# EAGLE board Ex Adafruit I2C Adapter (EAGLE 7.2.0)

Size 26.5 x 32 mm. Coordinates in mm from the lower left corner, seen from the top.
Outline: 0,0 26.5,0 26.5,32 0,32 0,0
Copper layers (1*16): Top 0.035mm / dielectric 1.5mm / Bottom 0.035mm
Design rules "default": minimum track width 10mil, minimum drill 24mil, track to track 8mil, track to pad 8mil, pad to pad 8mil, via to via 8mil, smd to smd 8mil, copper to edge 40mil, drill to drill 8mil, minimum pad ring 10mil, minimum via ring 8mil, stop-mask expansion 4mil, vias tented up to drill 0mil, thermal gap 10mil

## Footprints (pad centres in the part's own frame; a part is rotated, then mirrored left to right if it is on the bottom)
1X04 = drill 1.016 long: 1 -3.81,0; 2 -1.27,0; 3 1.27,0; 4 3.81,0
CHIPLED_0805 = smd 1.2 x 1.2: A 0,-1.05; C 0,1.05
1X10-BIG = drill 1.016 pad 1.778 octagon: 1 -11.43,0; 2 -8.89,0; 3 -6.35,0; 4 -3.81,0; 5 -1.27,0; 6 1.27,0; 7 3.81,0; 8 6.35,0; 9 8.89,0; 10 11.43,0
R0805 = smd 1.1 x 1.4: 1 -1,0; 2 1,0

## Placement (x,y rotation side)
I2C_OUT_1  [1X04]  17.5,17.5 270 top
I2C_OUT_2  [1X04]  8.5,17.5 90 top
LEDPWR  [CHIPLED_0805]  13,8 0 top
NUSBIO_IN  PINHD-1X10  [1X10-BIG]  13.33,1.97 180 top
NUSBIO_OUT  PINHD-1X10  [1X10-BIG]  13.33,30.09 180 top
R_LEDPWR  [R0805]  16.5,8 90 top
R_PUP_CLK  [R0805]  22.5,8 90 top
R_PUP_DTA  [R0805]  19.5,8 90 top

## Library data of the parts
I2C_OUT_1 I2C_OUT_2 = pinhead
LEDPWR NUSBIO_IN NUSBIO_OUT R_LEDPWR R_PUP_CLK R_PUP_DTA = adafruit

## Nets
GND: I2C_OUT_1.3 I2C_OUT_2.3 NUSBIO_IN.10 NUSBIO_OUT.10 R_LEDPWR.2
N$1: LEDPWR.C R_LEDPWR.1
N$2: I2C_OUT_1.4 I2C_OUT_2.4 LEDPWR.A NUSBIO_IN.9 NUSBIO_OUT.9 R_PUP_CLK.1 R_PUP_DTA.1
N$3: NUSBIO_IN.6 NUSBIO_OUT.6
N$4: NUSBIO_IN.5 NUSBIO_OUT.5
N$5: NUSBIO_IN.3 NUSBIO_OUT.3
N$6: NUSBIO_IN.8 NUSBIO_OUT.8
N$7: NUSBIO_IN.4 NUSBIO_OUT.4
N$8: NUSBIO_IN.7 NUSBIO_OUT.7
N$9: I2C_OUT_1.1 I2C_OUT_2.1 NUSBIO_IN.1 NUSBIO_OUT.1 R_PUP_CLK.2
N$10: I2C_OUT_1.2 I2C_OUT_2.2 NUSBIO_IN.2 NUSBIO_OUT.2 R_PUP_DTA.2

## Tracks (layer width: path | path; a pad name or v marks a point on that pad's centre or on a via)
GND  (4 unrouted)
N$1  (1 unrouted)
N$2  (6 unrouted)
N$3  (1 unrouted)
N$4  (1 unrouted)
N$5  (1 unrouted)
N$6  (1 unrouted)
N$7  (1 unrouted)
N$8  (1 unrouted)
N$9  (4 unrouted)
N$10  (4 unrouted)

## Text on the board
tNames: GND | VCC | 7 | 6 | 5 | 4 | 3 | 2 | i2cDTA | MadeInTheUSB.net | i2cCLK | VCC | CLK | GND | DTA | DTA | GND | CLK | VCC | I2C Adapter | Nusbio's Adafruit | Nusbio | + | GND | VCC | 7 | 6 | 5 | 4 | 3 | 2 | 1 | 0 | PCBv2